# Altium PCB butterworth5-8th.PcbDoc
Units mm, origin at the board's own origin, x right, y up, seen from the top; angles counter-clockwise.
Board outline 48.26 x 38.1 mm, 2 copper layers (Top Layer, Bottom Layer); 39 components, 20 nets, 112 pads, 13 vias.
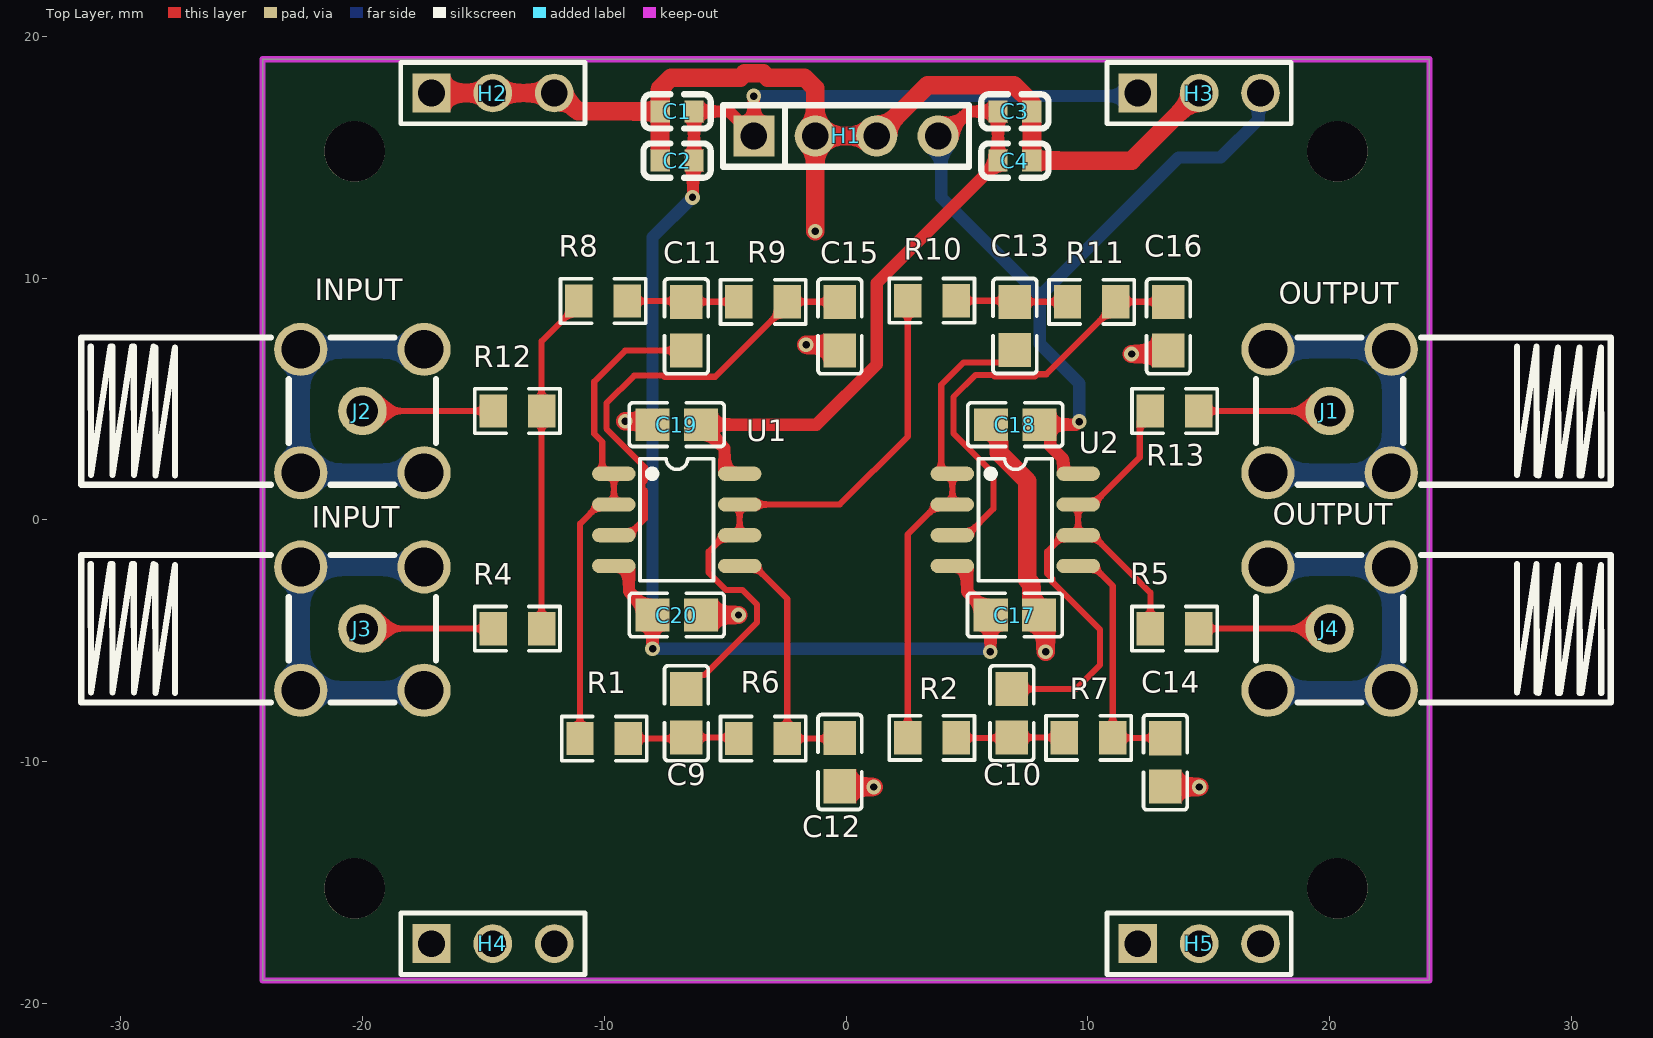
[diagram p0: Top Layer view]
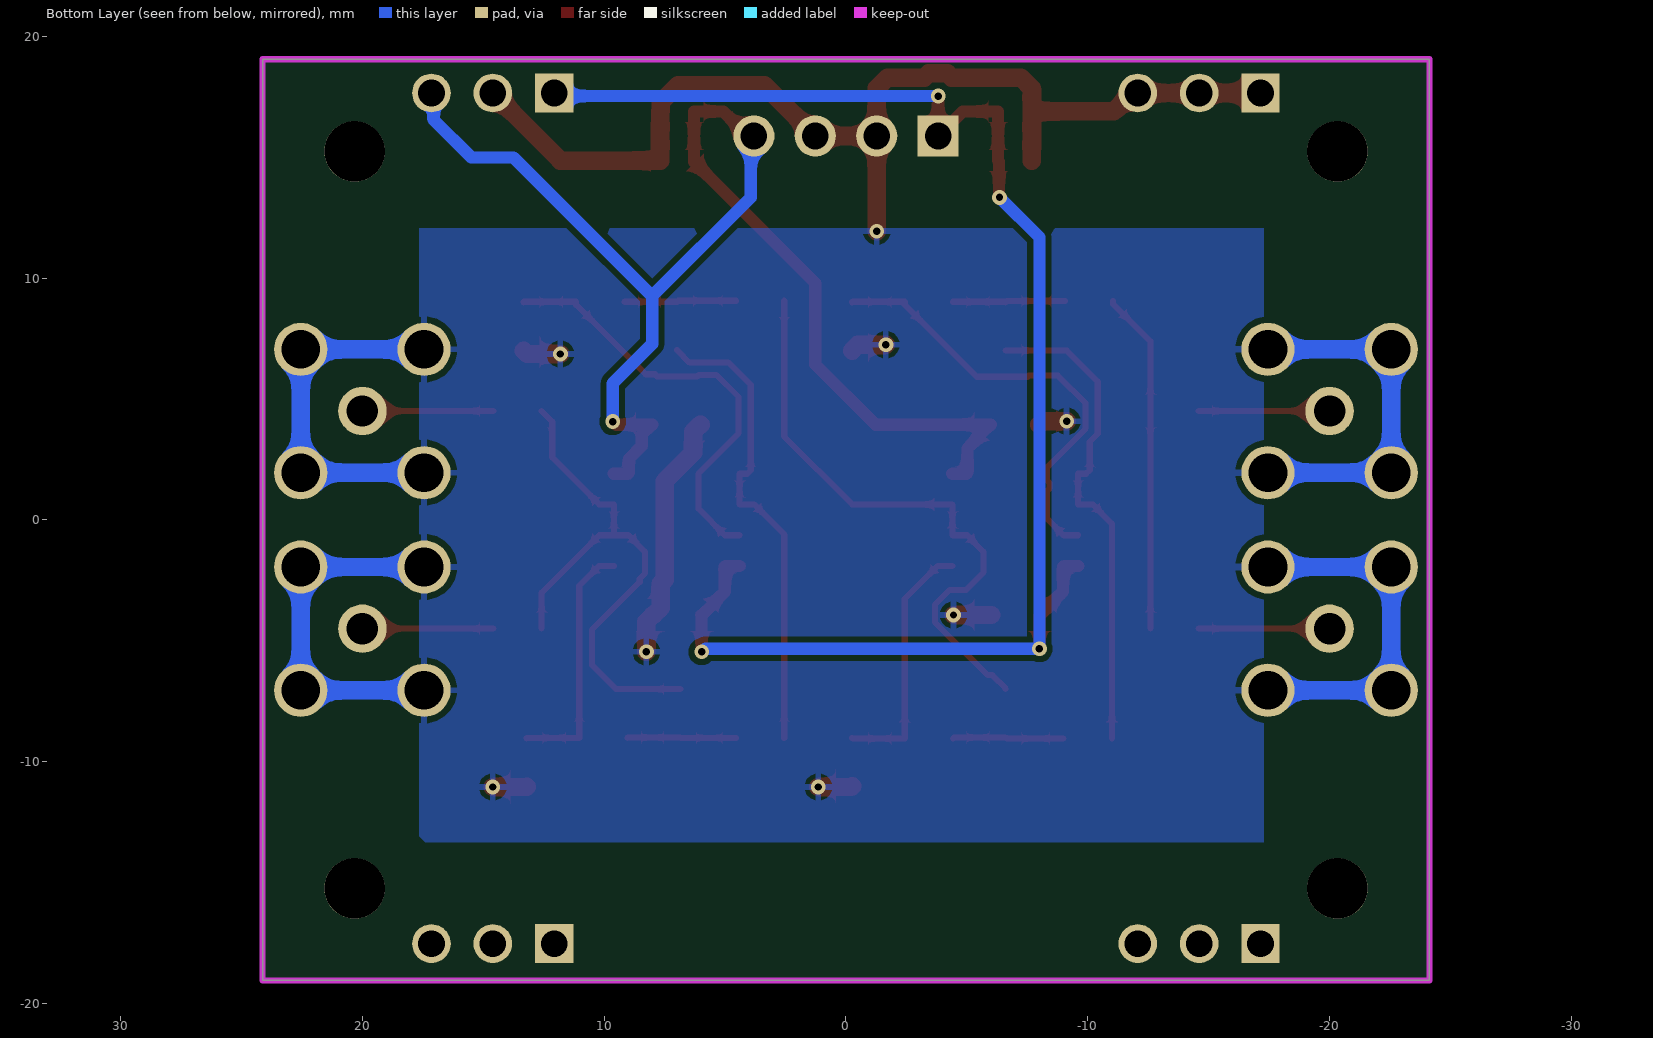
[diagram p1: Bottom Layer view, seen from below]

## Layer stack, top to bottom
Top Solder: solder mask 0.0102, Solder Resist, Dk 3.5
Top Layer: signal copper 0.0356
Dielectric 1: dielectric 0.32, FR-4, Dk 4.8
Bottom Layer: signal copper 0.0356
Bottom Solder: solder mask 0.0102, Solder Resist, Dk 3.5

## Board outline
-24.13,-19.05 -24.13,19.05 24.13,19.05 24.13,-19.05

## Design rules (kind name [scope] priority, off if disabled: settings)
Clearance [All] p1: gap=0.254 ignorepadtopadclearanceinfootprint=FALSE
PolygonConnect [All] p1: connectstyle=Relief reliefconductorwidth=0.254 reliefentries=4 polygonreliefangle="90 Angle" airgapwidth=0.254
RoutingVias [All] p1: holewidth=0.305 width=0.61 viastyle="Through Hole" minholewidth=0.305 minwidth=0.61 maxholewidth=0.305 maxwidth=0.61
SilkToSilkClearance [All] p1: silktosilkclearance=0.1
SilkToSolderMaskClearance [IsPad] p1: minsilkscreentomaskgap=0.1 clearancetoexposedcopper=TRUE
SolderMaskExpansion [All] p1: expansion=0.102 istentingtop=FALSE
SupplyNets "Schematic Supply Nets_2" [InNet('-5')] p1: voltage=0.000
SupplyNets "Schematic Supply Nets_1" [InNet('GND')] p2: voltage=0.000
SupplyNets "Schematic Supply Nets" [InNet('+5')] p3: voltage=0.000
Width GND [InNetClass('GND')] p1: maxlimit=0.762 minlimit=0.762 preferedwidth=0.762
Width power [InNetClass('power')] p2: maxlimit=0.508 minlimit=0.508 preferedwidth=0.508
Width [All] p3: maxlimit=0.254 minlimit=0.254 preferedwidth=0.254
28 further rules are at their usual default settings.

## Classes and differential pairs
net class GND: GND
net class power: +5 -5

## Components (designator, comment, footprint, x,y, rotation, side; value= is the part's Value field where it differs from the comment)
C1 "10uF" C0603 -6.985,16.891 r0 top value=0.1uF
C2 "0.1uF" C0603 -6.985,14.859 r0 top
C3 "0.1uF" C0603 6.985,16.891 r180 top
C4 "10" C0603 6.985,14.859 r180 top value=0.1uF
C9 "cc0805krx7r9bb104" C0805 -6.604,-8.001 r270 top value=XX
C10 "cc0805krx7r9bb104" C0805 6.858,-8.001 r270 top value=XX
C11 "cc0805krx7r9bb104" C0805 -6.604,8.001 r270 top value=XX
C12 "cc0805krx7r9bb104" C0805 -0.254,-10.017 r90 top value=XX
C13 "cc0805krx7r9bb104" C0805 6.985,8.017 r270 top value=XX
C14 "cc0805krx7r9bb104" C0805 13.208,-10.033 r90 top value=XX
C15 "cc0805krx7r9bb104" C0805 -0.254,8.001 r90 top value=XX
C16 "cc0805krx7r9bb104" C0805 13.335,8.001 r90 top value=XX
C17 "cc0805krx7r9bb104" C0805 6.985,-3.937 r180 top value=0.1uF
C18 "cc0805krx7r9bb104" C0805 7,3.937 r0 top value=0.1uF
C19 "cc0805krx7r9bb104" C0805 -7,3.937 r0 top value=0.1uF
C20 "cc0805krx7r9bb104" C0805 -7,-3.937 r180 top value=0.1uF
H1 "PZ254V-11-04P" HDR-TH_4P-P2.54-V-M 0,15.875 r0 top
H2 "2.54-1*3P针" HDR-TH_3P-P2.54-V-M-1 -14.605,17.653 r0 top
H3 "2.54-1*3P针" HDR-TH_3P-P2.54-V-M-1 14.605,17.653 r0 top
H4 "2.54-1*3P针" HDR-TH_3P-P2.54-V-M-1 -14.605,-17.526 r0 top
H5 "2.54-1*3P针" HDR-TH_3P-P2.54-V-M-1 14.605,-17.526 r0 top
J1 "-" SMA-TH_BWSMA-KWE-Z001 20,4.5 r0 top
J2 "-" SMA-TH_BWSMA-KWE-Z001 -20,4.5 r180 top
J3 "-" SMA-TH_BWSMA-KWE-Z001 -20,-4.5 r180 top
J4 "-" SMA-TH_BWSMA-KWE-Z001 20,-4.5 r0 top
R1 "XX" R0805 -10,-9.048 r0 top
R2 "XX" R0805 3.556,-9.017 r0 top
R4 "0Ω" R0805 -13.589,-4.5 r0 top value=XX
R5 "0Ω" R0805 13.589,-4.5 r0 top value=XX
R6 "XX" R0805 -3.429,-9.048 r0 top
R7 "XX" R0805 10.033,-9.017 r0 top
R8 "XX" R0805 -10.049,9.048 r0 top
R9 "XX" R0805 -3.429,9.017 r0 top
R10 "XX" R0805 3.556,9.064 r0 top
R11 "XX" R0805 10.16,9.017 r0 top
R12 "0Ω" R0805 -13.589,4.5 r0 top value=XX
R13 "0Ω" R0805 13.589,4.5 r0 top value=XX
U1 "opa2140aid" SOIC-8_L4.9-W3.9-P1.27-LS6.0-BL 7,0 r270 top
U2 "opa2140aid" SOIC-8_L4.9-W3.9-P1.27-LS6.0-BL -7,0 r270 top

## Footprints (in the part's own frame and the unit in brackets; to place one, negate y for a bottom-side part, rotate by r counter-clockwise, add the part's x,y. Pads: shape width x height; smd on the part's side, far side on the other; paste and mask are expansions set on the pad)
C0603 [mm]
  rect 0.8x0.9 smd: 1(-0.7,0) 2(0.7,0)
  silkscreen extent -1.39,-0.71 1.39,0.71
C0805 [mm]
  rect 1.41x1.35 smd paste-100 mask+0.051: 1(-1,0) 2(1,0)
  silkscreen extent -1.96,-0.9 1.96,0.9
HDR-TH_3P-P2.54-V-M-1 [mm]
  rect 1.575x1.6 hole 1.1 paste-2539.97 mask+0.05: 1(-2.54,0)
  round 1.6 hole 1.1 paste-2539.97 mask+0.05: 2(0,0) 3(2.54,0)
  silkscreen extent -3.81,-1.27 3.81,1.27
HDR-TH_4P-P2.54-V-M [mm]
  rect 1.7x1.7 hole 1.1: 1(-3.81,0)
  round 1.7 hole 1.1: 2(-1.27,0) 3(1.27,0) 4(3.81,0)
  silkscreen extent -5.08,-1.27 5.08,1.27
R0805 [mm]
  rect 1.133x1.377 smd paste-100 mask+0.051: 1(-1,0) 2(1,0)
  silkscreen extent -1.76,-0.92 1.76,0.92
SMA-TH_BWSMA-KWE-Z001 [mm]
  round 2.2 hole 1.6 paste-2539.97 mask+0.051: 1(-2.55,-2.55) 2(-2.55,2.55) 3(2.55,2.55)
  round 2.2 hole 1.6 copper offset 0,0 paste-2539.97 mask+0.051: 4(2.55,-2.55)
  round 2 hole 1.3 paste-2539.97 mask+0.051: 5(0,0)
  silkscreen extent -3.05,-3.05 11.63,3.05
SOIC-8_L4.9-W3.9-P1.27-LS6.0-BL [mm]
  oval 0.588x1.8 smd paste+0 mask+0.051: 1(-1.905,-2.6) 2(-0.635,-2.6) 3(0.635,-2.6) 4(1.905,-2.6) 5(1.905,2.6) 6(0.635,2.6) 7(-0.635,2.6) 8(-1.905,2.6)
  silkscreen extent -2.53,-1.52 2.53,1.52

## Part data
C1 C2 C3 C4: library part CAP_0603, "CAP_0603", AddInBom=yes, ConvertToPcb=yes, Device=CAP_0603, FootprintName=C0603, ModelId=ac125912035d415993ca9572d50418b1聨0819f05c4eef4c71ace90d822a990e87, ModelName=C0603_L1.6-W0.8-H0.8, ModelTransform=62.992,31.496,0,0,0,0,0,0,0, Supplier Footprint=0603, Symbol=Capacitance
C9 C10 C11 C12 C13 C14 C15 C16 C17 C18 C19 C20: "容值:100nF;精度:±10%;额定电压:50V;温度系数:X7R;", JLCPCB Part Class="Basic Part", LCSC Part Name="100nF ±10% 50V", Manufacturer=YAGEO(国巨), ManufacturerPart=CC0805KRX7R9BB104, Temperature Coefficient=X7R, Tolerance=±10%, Voltage Rating=50V, AddInBom=yes, ConvertToPcb=yes, Datasheet=https://item.szlcsc.com/datasheet/CC0805KRX7R9BB104/50686.html, FootprintName=C0805, ModelId=1ba041120af144c991958decab20d241, ModelName=C0805_L2.0-W1.3-H1.3, ModelTransform=78.74,51.181,0,0,0,0,0,0.0005,0, Supplier=LCSC, Supplier Footprint=0805, SupplierPart=C49678, Symbol=CC0805KRX7R9BB104
H1: "插针结构:1x4P;间距:2.54mm;行距:-;圆针/方针:方针;安装方式:直插;排数:单排;总PIN位数:4P;额定电流:3A;额定电压:250V;配合针长度:6.1mm;塑高:2.5mm;端接针长度:3mm;触头材质:黄铜;触头镀层:金;工作温度:-40℃~+105℃;颜色:黑色;", Color=黑色, Current Rating=3A, JLCPCB Part Class="Extended Part", LCSC Part Name="1x4P 间距:2.54mm 方针 直插", Manufacturer=XFCN(兴飞), Operating Temperature=-40℃~+105℃, Voltage Rating (Max)=250V, AddInBom=yes, Circluar Pins/Square Pins=方针, Contact Material=黄铜, Contact Plating=金, ConvertToPcb=yes, Datasheet=https://item.szlcsc.com/datasheet/PZ254V-11-04P/2801085.html, Device=PZ254V-11-04P, FootprintName=HDR-TH_4P-P2.54-V-M, Insulation Height=2.5mm, Length of End Connection Pin=3mm, Length of Mating Pin=6.1mm, ManufacturerPart=PZ254V-11-04P, ModelId=112f4d05e8d64e99ab9a333894bea4f9聨0819f05c4eef4c71ace90d822a990e87, ModelName=HDR-TH_4P-P2.54-M-LI-1X4P, ModelTransform=399.999,104.7242,0,0,0,0,0,0,-118.11, Mounting Type=直插, Number of Pins=4P, Number of Rows=单排, Pin Structure=1x4P, Pitch=2.54mm, Row Spacing=-, Supplier=LCSC, Supplier Footprint=插件,P=2.54mm, SupplierPart=C2691448, Symbol=PZ254V-11-04P_C2691448
H2 H3 H4 H5: "插针结构:1x3P;间距:2.54mm;行距:-;圆针/方针:方针;安装方式:直插;排数:单排;总PIN位数:3P;额定电流:3A;额定电压:-;配合针长度:6mm;塑高:2.5mm;端接针长度:3mm;触头材质:黄铜;触头镀层:金;工作温度:-40℃~+105℃;颜色:黑色;", Color=黑色, Current Rating=3A, JLCPCB Part Class="Extended Part", LCSC Part Name="1x3P 间距:2.54mm 方针 直插", Manufacturer=BOOMELE(博穆精密), Operating Temperature=-40℃~+105℃, Voltage Rating (Max)=-, AddInBom=yes, Circluar Pins/Square Pins=方针, Contact Material=黄铜, Contact Plating=金, ConvertToPcb=yes, Datasheet=https://item.szlcsc.com/datasheet/2.54-1*3P%25E9%2592%2588/50265.html, Device=2.54-1*3P针, FootprintName=HDR-TH_3P-P2.54-V-M-1, Insulation Height=2.5mm, Length of End Connection Pin=3mm, Length of Mating Pin=6mm, ManufacturerPart=2.54-1*3P针, ModelId=94a8ffe137b6410295cb18cd3ffd99db聨0819f05c4eef4c71ace90d822a990e87, ModelName=HDR-M-2.54_1x3, ModelTransform=299.9994,100,0,0,0,0,0,0,-118.11, Mounting Type=直插, Number of Pins=3P, Number of Rows=单排, Pin Structure=1x3P, Pitch=2.54mm, Row Spacing=-, Supplier=LCSC, Supplier Footprint=插件,P=2.54mm, SupplierPart=C49257, Symbol=Header-Male-2.54_1x3
J1 J2 J3 J4: library part BWSMA-KWE-Z001, "连接器类型:板端;接口类型:内孔;端口数量:1;接口直径:6.2mm;接口长度/高度:-;频率:-;射频系列:SMA;阻抗:50Ω;样式:弯头;工作温度:-;", JLCPCB Part Class="Extended Part", LCSC Part Name="内孔 SMA 弯头", Manufacturer="BAT WIRELESS(蝙蝠无线)", Add into BOM=yes, Connector Type=板端, Convert to PCB=yes, Datasheet=https://item.szlcsc.com/datasheet/BWSMA-KWE-Z001/508500.html, Device=BWSMA-KWE-Z001, FootprintName=SMA-TH_BWSMA-KWE-Z001, Impedance=50Ω, Interface=内孔, Interface Diameter=6.2mm, Interface Length/Height=-, Manufacturer Part=BWSMA-KWE-Z001, ModelId=00e6cb997786490aa9471f87b73321e2聨0819f05c4eef4c71ace90d822a990e87, ModelName=SMA-TH_5P-L14.5-W6.0-H9.6_BWSMA-KWE-Z001, ModelTransform=570.869,248.031,0,0,0,0,167.323,0,-137.795, Number of Ports=1, Operating Temperature Range=-, Rated Voltage (Max)=-, RF Series=SMA, Style=弯头, Supplier=LCSC, Supplier Footprint=插件, Supplier Part=C496551, Symbol=BWSMA-KWE-Z001
R1 R2 R4 R5 R6 R7 R8 R9 R10 R11 R12 R13: library part Res_0805, "Res_0805", AddInBom=yes, ConvertToPcb=yes, Device=Res_0805, FootprintName=R0805, ModelId=37a81e68749a4138bd2dfa6897b24b85聨0819f05c4eef4c71ace90d822a990e87, ModelName=R0805_L2.0-W1.3-H0.6, ModelTransform=78.74,51.181,0,0,0,0,0,-0.0005,0, Supplier Footprint=0805, Symbol=电阻
U1 U2: "放大器数:2;轨到轨:轨到轨输入,轨到轨输出;增益带宽积(GBW):11MHz;输入失调电压(Vos):120uV;压摆率(SR):20V/us;输入偏置电流(Ib):10pA;", Ib - Input Bias Current=10pA, Input Offset Voltage Drift(Vos TC)=1uV/℃, Input Voltage Noise Density=5.1nV/√Hz@1kHz, JLCPCB Part Class="Extended Part", LCSC Part Name="高精度、低噪声、轨到轨输出、11MHz JFET运算放大器", Manufacturer=TI(德州仪器), ManufacturerPart=OPA2140AID, Operating Temperature=-40℃~+125℃, Output Current=36mA, Quiescent Current=1.8mA, Vos - Input Offset Voltage=120uV, AddInBom=yes, Common Mode Rejection Ratio(CMRR)=120dB, ConvertToPcb=yes, Datasheet=https://www.ti.com/cn/lit/ds/symlink/opa140.pdf, Dual Supply=-18V~-2.25V；2.25V~18V, Features=-, FootprintName=SOIC-8_L4.9-W3.9-P1.27-LS6.0-BL, Gain Bandwidth Product=11MHz, Input Offset Current(Ios)=10pA, ModelId=e81d2f7d937b4a6ab1dca543ff5d56a4, ModelName=SOIC-8_L4.9-W3.9-H1.7-LS6.0-P1.27, ModelTransform=192.913,236.22,0,0,0,0,0,0,0, Number of Channels=2, Rail to Rail=轨到轨输入,轨到轨输出, Single supply=4.5V~36V, Slew Rate=20V/us, Supplier=LCSC, Supplier Footprint=SOIC-8, SupplierPart=C83657, Symbol=OPA2140AID

## Free pads (board coordinates)
  round 2.5 hole 2.5: 4(-20.32,15.24) 5(-20.32,-15.24) 6(20.32,-15.24) 7(20.32,15.24)

## Via types
v1: diameter 0.61, hole 0.305, Top Layer to Bottom Layer, 13 vias

## Nets (pads, with @x,y where several pads share a name; then routed paths per layer and width w, separated by ;. In a path a pad name is that pad's centre, name@x,y a point inside that pad or via, vN(x,y) a via of type N, cw(c..) or ccw(c..) an arc to the next point about the centre after c; other vN are vias at no path point)
+5: C3.2 C4.2 C18.2 C19.2 H1.4 H3.3 U1.8 U2.8 | length 59
  Top Layer w0.508: U2.8 -4.984,1.905 -5.021,1.942 -5.021,2.958 -5.549,3.486 -5.549,3.516 -5.97,3.937 C19.2 -1.22,3.937 1.27,6.427 1.27,9.794 6.285,14.809 C4.2 C3.2 5.074,16.891 4.058,15.875 H1.4 ; C18.2 9.498,3.937 9.625,4.064 v1(9.652,4.064) ; C18.2@8.03,3.937 8.451,3.516 8.451,3.054 8.979,2.526 8.979,1.942 9.016,1.905 U1.8
  Bottom Layer w0.508: H1.4 3.937,15.748 3.937,13.335 8.019,9.253 ; v1(9.652,4.064) 9.652,5.638 8.019,7.271 8.019,9.253 ; H3.3 17.057,17.565 17.057,16.549 15.494,14.986 13.752,14.986 8.019,9.253
-5: C1.2 C2.2 C17.2 C20.2 H1.1 H3.1 U1.4 U2.4 | length 66.5
  Top Layer w0.508: U2.4 -9.016,-1.905 -8.979,-1.942 -8.979,-2.958 -8.451,-3.486 -8.451,-3.516 -8.03,-3.937 C20.2 v1(-8,-5.333) ; v1(-6.35,13.335) -6.331,13.354 -6.331,14.813 C2.2 C1.2 -4.826,16.891 H1.1 v1(-3.81,17.526) ; U1.4 4.972,-1.905 5.009,-1.942 5.009,-2.961 5.534,-3.486 5.534,-3.516 5.955,-3.937 C17.2 5.977,-3.945 5.977,-5.453 v1(5.969,-5.461)
  Bottom Layer w0.508: v1(-6.35,13.335) -8,11.685 v1(-8,-5.333) 5.814,-5.333 5.942,-5.461 v1(5.969,-5.461) ; v1(-3.81,17.526) 11.938,17.526 H3.1
GND: C1.1 C2.1 C3.1 C4.1 C12.1 C14.1 C15.1 C16.1 C17.1 C18.1 C19.1 C20.1 H1.2 H1.3 H2.1 H2.2 H2.3 H3.2 J1.1 J1.2 J1.3 J1.4 J2.1 J2.2 J2.3 J2.4 J3.1 J3.2 J3.3 J3.4 J4.1 J4.2 J4.3 J4.4 | length 126.4
  Top Layer w0.762: H2.1 H2.2 H2.3 -11.838,17.653 -11.076,16.891 C1.1 ; v1(-9.132,4.076) -8.139,4.076 C19.1 ; C2.1 C1.1 ; C20.1 v1(-4.445,-3.937) ; v1(-1.651,7.239) -0.492,7.239 C15.1 ; v1(-1.27,11.938) H1.2 ; C12.1 -0.222,-11.049 v1(1.143,-11.049) ; C18.1 6.03,3.937 6.324,3.643 6.324,2.772 7.493,1.603 7.493,-2.476 7.661,-2.644 7.661,-3.643 7.955,-3.937 C17.1 8.255,-4.207 v1(8.255,-5.461) ; v1(11.811,6.858) 13.192,6.858 C16.1 ; C14.1 13.224,-11.049 v1(14.605,-11.049) ; H3.2 11.811,14.859 C4.1 C3.1 7.666,16.91 7.666,17.258 6.948,17.976 3.371,17.976 H1.3 H1.2 ; C1.1 -7.685,17.842 -7.239,18.288 -4.377,18.288 -4.199,18.466 -3.421,18.466 -3.243,18.288 -1.716,18.288 -1.27,17.842 H1.2
  Bottom Layer w0.762: J3.4 J3.3 J3.2 ; J3.4 J3.1 ; J2.2 J2.3 -22.55,7.05 J2.1 ; J4.1 J4.4 J4.3 J4.2 ; J1.1 J1.4 ; J1.2 J1.3 J1.4
INPUT: R4.2 R8.1 R12.2 | length 14.2
  Top Layer w0.254: R4.2 R12.2 -12.589,7.386 -11.049,8.926 R8.1
NetC9_2: C9.2 R1.2 R6.1 | length 4.6
  Top Layer w0.254: R1.2 -6.651,-9.048 C9.2 -4.476,-9.001 R6.1
NetC10_2: C10.2 R2.2 R7.1 | length 4.5
  Top Layer w0.254: R2.2 6.842,-9.017 C10.2 9.017,-9.001 R7.1
NetC11_1: C11.1 R8.2 R9.1 | length 4.6
  Top Layer w0.254: R8.2 -6.651,9.048 C11.1 -6.588,9.017 R9.1
NetC11_2: C11.2 R1.1 U2.1 U2.2 | length 20.6
  Top Layer w0.254: R1.1 -11,-0.159 -10.206,0.635 U2.2 U2.1 -9.925,1.905 -10.079,2.059 -10.079,3.226 -10.414,3.561 -10.414,5.715 -9.128,7.001 C11.2
NetC12_2: C12.2 R6.2 U2.5 | length 10.5
  Top Layer w0.254: U2.5 -3.794,-1.905 -2.429,-3.27 R6.2 -0.285,-9.048 C12.2
NetC13_1: C13.1 R10.2 R11.1 | length 4.6
  Top Layer w0.254: R10.2 6.938,9.064 C13.1 R11.1
NetC13_2: C13.2 R2.1 U1.1 U1.2 | length 19.7
  Top Layer w0.254: R2.1 2.556,-0.603 3.794,0.635 U1.2 ; U1.1 4.091,1.905 3.937,2.059 3.937,5.588 4.854,6.505 6.473,6.505 C13.2 ; U1.2 U1.1
NetC14_2: C14.2 R7.2 U1.5 | length 10.2
  Top Layer w0.254: U1.5 10.206,-1.905 11.033,-2.732 R7.2 13.192,-9.017 C14.2
NetC15_2: C15.2 R9.2 U2.3 | length 18.6
  Top Layer w0.254: U2.3 -8.994,-0.635 -8.319,0.04 -8.319,1.207 -8.423,1.311 -8.423,1.521 -8.319,1.625 -8.319,2.185 -9.906,3.772 -9.906,4.826 -8.763,5.969 -7.558,5.969 -7.504,5.915 -5.409,5.915 -2.429,8.895 R9.2 -0.27,9.017 C15.2
NetC16_2: C16.2 R11.2 U1.3 | length 18.1
  Top Layer w0.254: U1.3 5.006,-0.635 6.096,0.455 6.096,1.922 4.445,3.573 4.445,5.08 5.362,5.997 6.086,5.997 6.152,5.931 7.818,5.931 7.907,6.02 8.285,6.02 11.16,8.895 R11.2 13.319,9.017 C16.2
NetJ1_5: J1.5 R13.2 | length 5.4
  Top Layer w0.254: R13.2 J1.5
NetJ2_5: J2.5 R12.1 | length 5.4
  Top Layer w0.254: J2.5 R12.1
NetJ3_5: J3.5 R4.1 | length 5.4
  Top Layer w0.254: J3.5 R4.1
NetJ4_5: J4.5 R5.2 | length 5.4
  Top Layer w0.254: R5.2 J4.5
OUTA: C9.1 R10.1 U2.6 U2.7 | length 24.8
  Top Layer w0.254: C9.1 -6.604,-6.971 -6.056,-6.423 -5.853,-6.423 -3.683,-4.253 -3.683,-3.498 -4.278,-2.903 -4.963,-2.903 -5.681,-2.185 -5.681,-1.31 -5.006,-0.635 U2.6 ; U2.6 U2.7 ; U2.7 -0.254,0.635 2.556,3.445 R10.1
OUTB: C10.1 R5.1 R13.1 U1.6 U1.7 | length 23.4
  Top Layer w0.254: C10.1 9.509,-7.001 10.499,-6.011 10.499,-4.53 8.533,-2.564 8.533,-2.438 8.319,-2.224 8.319,-1.31 8.994,-0.635 U1.6 ; R5.1 12.589,-3.018 10.206,-0.635 U1.6 ; R13.1 12.15,4.061 12.15,2.579 10.206,0.635 U1.7 U1.6
pads on no net: H4.1 H4.2 H4.3 H5.1 H5.2 H5.3

## Polygon pours and split planes (outlines as drawn)
GND on Bottom Layer "GND_L02_P000" (solid, pour order 0): -17.272,12.065 -17.272,-13.335 17.399,-13.335 17.653,-13.081 17.653,12.065

## Keep-outs
Keep-Out Layer:
  the board outline again, w0.254

## Silkscreen, mask and mechanical layers (free items; w line width, h text height)
Top Overlay:
  text "INPUT" at -21.971,8.763 h1.52
  text "OUTPUT" at 17.907,8.636 h1.52
  text "OUTPUT" at 17.653,-0.508 h1.52
  text "INPUT" at -22.098,-0.635 h1.52